# Altium PCB Jade_v1_board.PcbDoc (part 2 of 2)
Units mm, origin at the board's own origin, x right, y up, seen from the top; angles counter-clockwise.
Board outline 20 x 55.5 mm, 4 copper layers (Top Layer, Layer 1, Layer 2, Bottom Layer), stack 0.547 mm thick; 95 components, 80 nets, 388 pads, 387 vias.
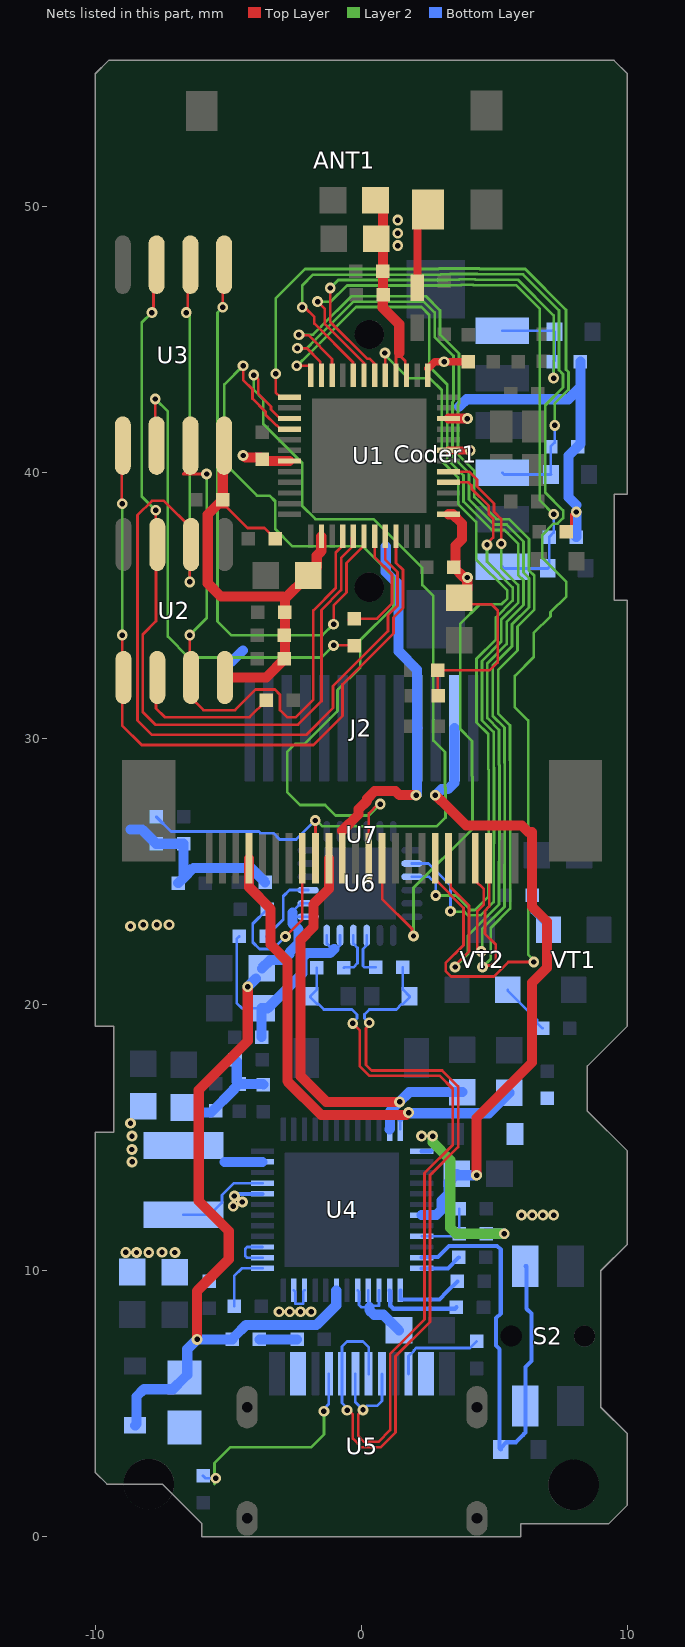
[diagram p4: the nets of this part, all layers, seen from the top]

## Via types
v1: diameter 0.406, hole 0.203, Top Layer to Bottom Layer, tented both sides, 387 vias

## Nets (pads, with @x,y where several pads share a name; then routed paths per layer and width w, separated by ;. In a path a pad name is that pad's centre, name@x,y a point inside that pad or via, vN(x,y) a via of type N, cw(c..) or ccw(c..) an arc to the next point about the centre after c; other vN are vias at no path point) (continued)
GPIO26: R13.2 U1.15 U7.9 | length 36.5
  Top Layer w0.102: v1(-4.043,43.669) -3.873,43.499 -3.873,42.968 -3.393,42.489 -3.393,42.376 -3.057,42.04 U1.15@-2.704,42.04 ; v1(-1.735,26.929) -1.727,26.921 -1.727,25.508 U7.9@-1.72,25.5
  Layer 2 w0.102: v1(-4.043,43.669) -4.043,43.11 -3.688,42.754 -3.688,41.838 -2.221,40.372 -2.221,38.75 -1.727,38.255 0.462,38.255 2.295,36.423 2.295,35.777 2.705,35.366 2.705,29.936 3.146,29.496 3.146,28.177 3.16,28.163 3.16,27.036 2.832,26.708 -1.453,26.708 -1.674,26.929 v1(-1.735,26.929)
  Bottom Layer w0.102: R13.2@-7.709,27.068 -7.152,26.512 -3.85,26.512 -3.79,26.452 -3.306,26.452 -3.067,26.213 -2.451,26.213 v1(-1.735,26.929)
GPIO27: U1.16 U7.13 | length 32.3
  Top Layer w0.102: v1(-4.445,44.022) -4.445,43.494 -4.089,43.138 -4.089,42.785 -3.593,42.289 -3.593,42.176 -3.205,41.788 -3.189,41.788 -3.041,41.64 U1.16@-2.704,41.64 ; U7.13@0.28,25.5 0.28,27.195 0.629,27.544 v1(0.711,27.544)
  Layer 2 w0.102: v1(-4.445,44.022) -5.151,43.316 -5.151,40.361 -3.929,39.139 -3.447,39.139 -3.237,38.929 -3.237,37.878 -2.599,37.239 0.041,37.239 1.206,36.075 1.206,34.959 -0.041,33.712 -0.041,32.687 -0.894,31.834 -0.894,31.043 -2.121,29.816 -2.469,29.816 -2.789,29.496 -2.789,27.993 -2.306,27.51 -1.362,27.51 -0.967,27.114 0.282,27.114 v1(0.711,27.544)
GPIO32: U1.12 U7.19 | length 39.2
  Top Layer w0.102: v1(-2.431,44.022) -1.949,44.022 -1.9,43.973 U1.12@-1.9,43.669 ; U7.19@3.28,25.5 3.357,25.424 3.357,24.419 4.045,23.73 4.045,22.004 3.526,21.485 v1(3.526,21.42)
  Layer 2 w0.102: v1(-2.431,44.022) -2.411,44.022 -1.956,44.478 -0.205,46.229 2.26,46.229 2.552,45.936 2.552,43.999 3.226,43.326 3.226,40.52 3.842,39.904 3.842,38.913 4.906,37.849 5.378,37.849 5.893,37.334 5.893,36.162 6.096,35.959 6.096,35.025 5.461,34.39 5.461,33.563 4.737,32.839 4.737,30.778 5.178,30.337 5.178,29.018 5.192,29.005 5.192,26.194 5.188,26.19 5.188,25.384 5.178,25.374 5.178,23.77 4.012,22.604 4.012,21.906 v1(3.526,21.42)
GPIO33: Coder1.4 D5.1 R22.1 U1.13 | length 24.2
  Top Layer w0.102: v1(-3.22,43.719) -3.22,43.018 U1.13@-3.041,42.84
  Layer 2 w0.102: v1(-3.22,43.719) -3.22,46.557 -2.115,47.662 2.902,47.662 2.915,47.676 4.44,47.676 4.454,47.662 6.16,47.662 7.697,46.126 7.697,43.877 7.786,43.787 7.786,43.124 7.268,42.606 v1(7.268,41.778)
  Bottom Layer w0.102: Coder1.4@5.3,40 5.366,39.934 D5.1@7.13,39.934 7.115,39.949 R22.1@7.115,40.985 7.268,41.138 v1(7.268,41.778)
GPIO34: U1.10 U7.22 | length 40.7
  Top Layer w0.102: v1(-2.347,45.189) -2.328,45.17 -1.991,45.17 -1.1,44.279 U1.10@-1.1,43.669 ; v1(4.556,21.42) 4.614,21.478 4.882,21.478 5.055,21.651 5.055,22.257 4.65,22.662 4.65,23.534 4.806,23.69 4.806,25.475 U7.22@4.78,25.5
  Layer 2 w0.102: v1(-2.347,45.189) -1.819,45.189 -1.509,45.499 -0.373,46.636 2.428,46.636 2.959,46.105 2.959,45.189 3.67,44.478 3.67,42.602 3.632,42.564 3.632,40.689 4.248,40.073 4.248,39.081 5.074,38.255 5.546,38.255 6.299,37.503 6.299,36.331 6.502,36.127 6.502,34.857 5.867,34.222 5.867,33.317 5.143,32.593 5.143,30.946 5.584,30.506 5.584,29.187 5.598,29.173 5.598,26.026 5.594,26.022 5.594,23.611 4.863,22.881 4.863,21.727 v1(4.556,21.42)
GPIO35: U1.11 U7.21 | length 38.4
  Top Layer w0.102: v1(-2.403,44.681) -2.051,44.681 -1.541,44.17 -1.541,43.71 U1.11@-1.5,43.669 ; U7.21@4.28,25.5 4.28,24.677 4.602,24.355 4.602,23.774 4.362,23.534 4.362,22.062 4.45,22.062 v1(4.508,22.004)
  Layer 2 w0.102: v1(-2.403,44.681) -2.04,44.681 -1.735,44.986 -0.289,46.432 2.344,46.432 2.755,46.021 2.755,45.105 3.467,44.394 3.467,42.698 3.429,42.661 3.429,40.604 4.045,39.988 4.045,38.997 4.99,38.052 5.462,38.052 6.096,37.419 6.096,36.246 6.299,36.043 6.299,34.941 5.664,34.306 5.664,33.478 4.94,32.754 4.94,30.862 5.381,30.422 5.381,29.103 5.395,29.089 5.395,26.11 5.391,26.106 5.391,25.299 5.381,25.29 5.381,23.686 4.54,22.845 4.54,22.037 v1(4.508,22.004)
GPIO36: U1.5 U7.14 | length 30.8
  Top Layer w0.102: U7.14@0.78,25.5 0.78,23.979 1.901,22.858 1.901,22.645 v1(1.96,22.587) ; v1(0.886,44.501) 0.893,44.494 0.893,43.677 U1.5@0.9,43.669
  Layer 2 w0.102: v1(0.886,44.501) 0.886,44.427 1.756,43.556 2.569,43.556 3.023,43.103 3.023,40.436 3.639,39.82 3.639,38.829 4.315,38.153 4.315,36.744 5.486,35.572 5.486,35.277 5.266,35.057 4.451,35.057 3.721,34.326 3.721,30.357 4.162,29.917 4.162,28.598 4.176,28.584 4.176,26.615 1.96,24.399 v1(1.96,22.587)
GPIO37: Coder1.1 D3.1 R18.1 U1.6 | length 19.2
  Top Layer w0.102: v1(-1.168,46.944) -1.168,45.675 0.224,44.283 0.318,44.283 0.5,44.101 U1.6@0.5,43.669
  Layer 2 w0.102: v1(-1.168,46.944) -0.868,47.245 3.235,47.245 3.246,47.257 3.668,47.257 3.681,47.269 4.272,47.269 4.285,47.256 5.891,47.256 7.227,45.92 v1(7.227,43.556)
  Bottom Layer w0.102: Coder1.1@5.3,45.334 7.227,45.334 D3.1@7.268,45.293 7.268,44.222 R18.1@7.216,44.171 7.227,44.159 v1(7.227,43.556)
GPIO38: Coder1.6 D4.1 R20.1 U1.7 | length 24.3
  Top Layer w0.102: v1(-1.643,46.432) -1.372,46.161 -1.372,45.591 0.1,44.119 U1.7@0.1,43.669
  Layer 2 w0.102: v1(-1.643,46.432) -1.151,46.432 -0.541,47.042 3.319,47.042 3.33,47.054 3.753,47.054 3.765,47.066 4.188,47.066 4.201,47.053 5.807,47.053 6.709,46.15 6.709,38.961 v1(7.23,38.44)
  Bottom Layer w0.102: Coder1.6@5.3,36.472 5.369,36.403 D4.1@7.006,36.403 7.064,36.461 R20.1@7.064,37.584 7.23,37.75 v1(7.23,38.44)
GPIO39: U1.8 U7.18 | length 50.2
  Top Layer w0.102: v1(-2.221,46.222) -2.141,46.222 -1.768,45.85 -1.768,45.603 -0.3,44.135 U1.8@-0.3,43.669 ; U7.18@2.78,25.5 2.78,24.707 3.842,23.646 3.842,22.239 3.17,21.567 3.17,21.273 3.378,21.064 4.983,21.064 5.527,21.608 v1(6.482,21.608)
  Layer 2 w0.102: v1(-2.221,46.222) -2.221,47.046 -1.819,47.448 2.975,47.448 2.987,47.46 3.331,47.46 3.343,47.473 4.356,47.473 4.369,47.459 6.076,47.459 7.431,46.105 7.431,43.856 7.583,43.703 7.583,43.208 6.912,42.537 6.912,39.261 7.586,38.587 7.586,38.293 7.377,38.084 7.23,38.084 6.805,37.659 6.805,36.791 7.705,35.891 7.705,35.353 7.112,34.76 7.112,34.604 6.477,33.969 6.477,33.065 5.769,32.357 5.769,31.183 6.269,30.683 6.269,21.898 6.482,21.685 v1(6.482,21.608)
IPSOUT: C24.2 C25.2 C26.2 R16.1 U4.13 U4.38 U4.39 U4.44 | length 10.2
  Layer 2 w0.381: v1(2.678,15.065) 2.678,14.829 3.343,14.164 3.343,11.615 3.566,11.392 v1(5.369,11.392)
  Bottom Layer w0.102: U4.38@-3.715,10.494 -4.305,10.494 -4.365,10.553 -4.365,10.824 -4.295,10.894 U4.39@-3.715,10.894
  Bottom Layer w0.152: v1(-4.77,12.812) -4.702,12.812 -4.62,12.894 U4.44@-3.715,12.894 ; U4.13@2.267,14.494 2.605,14.494 2.748,14.637 2.748,14.763 2.701,14.81 2.701,15.016 v1@2.653,15.065
  Bottom Layer w0.381: R16.1@4.696,11.392 v1(5.369,11.392)
  other v1: -8.855,10.693 -8.453,10.688 -7.99,10.688 -7.496,10.698 -7.01,10.688 -4.819,12.428 -4.47,12.588 2.265,15.065
LCD_BL: C28.2 J2.2 U4.19 | length 24.6
  Top Layer w0.381: v1(2.78,27.876) 2.787,27.876 2.985,27.678 3.009,27.678 3.946,26.742 6.028,26.742 6.272,26.498 6.416,26.498 6.416,23.69 6.977,23.128 6.977,21.394 6.416,20.833 6.416,17.828 4.331,15.743 v1(4.331,13.59)
  Bottom Layer w0.381: U4.19@2.267,12.094 2.275,12.101 2.826,12.101 3.015,12.29 3.015,12.639 3.284,12.909 3.284,13.335 C28.2@3.594,13.644 3.648,13.59 v1(4.331,13.59) ; v1(2.78,27.876) 2.787,27.876 3.019,28.108 3.259,28.108 3.5,28.349 J2.2@3.5,30.4
NetANT1_1: ANT1.2 C1.2 C3.2 | length 2.9
  Top Layer w0.293: C3.2@2.108,47.193 2.108,49.499 ANT1.2@2.499,49.889
NetC21_2: C21.2 R11.1 | length 1.4
  Bottom Layer w0.381: R11.1@-3.834,7.423 -3.833,7.421 -2.417,7.421 C21.2@-2.416,7.42
NetC22_2: C22.2 U4.26 | length 3.1
  Bottom Layer w0.152: U4.26@1.063,9.264 1.087,9.24 1.087,8.686 1.2,8.574 3.519,8.574 C22.2@3.576,8.631
NetC23_2: C23.2 R16.2 U4.21 | length 2.4
  Bottom Layer w0.102: U4.21@2.267,11.294 3.581,11.294 R16.2@3.68,11.392 C23.2@3.68,12.331
NetC27_2: C27.2 U4.25 | length 2.8
  Bottom Layer w0.152: U4.25@1.463,9.264 1.463,8.944 1.487,8.92 2.931,8.92 3.225,9.215 C27.2@3.61,9.601
NetD6_2: D6.2 R23.1 U5.6 U5.8 | length 28.9
  Top Layer w0.102: v1(-0.32,19.301) -0.056,19.037 -0.056,17.684 0.3,17.328 2.952,17.328 3.435,16.845 3.435,14.735 2.376,13.676 2.376,8.166 1.082,6.872 1.082,4.011 0.64,3.569 0.097,3.569 -0.117,3.782 -0.117,4.594 v1(0.061,4.772)
  Bottom Layer w0.102: R23.1@-1.672,21.395 -1.672,20.568 D6.2@-1.912,20.327 -1.912,20.277 -1.663,20.028 -1.613,20.028 -1.41,19.825 -0.356,19.825 -0.163,19.632 -0.163,19.482 -0.32,19.324 v1(-0.32,19.301) ; U5.6@-0.225,6.124 -0.225,5.059 v1(0.061,4.772) v1(0.061,4.772) 0.211,4.922 0.594,4.922 0.775,5.103 U5.8@0.775,6.124
NetD7_1: D7.1 R25.1 U5.5 U5.7 | length 30.8
  Top Layer w0.102: v1(-0.537,4.757) -0.483,4.757 -0.32,4.594 -0.32,3.698 0.012,3.365 0.724,3.365 1.285,3.926 1.285,6.788 2.579,8.082 2.579,13.592 3.638,14.651 3.638,16.929 3.036,17.531 0.384,17.531 0.177,17.739 0.177,19.119 0.3,19.242 v1(0.3,19.324)
  Bottom Layer w0.102: v1(-0.537,4.757) -0.537,4.839 -0.725,5.027 U5.5@-0.725,6.124 -0.725,7.156 -0.537,7.344 0.061,7.344 0.275,7.129 U5.7@0.275,6.124 ; v1(0.3,19.324) 0.278,19.324 0.12,19.482 0.12,19.64 0.3,19.819 0.753,19.819 0.759,19.825 1.314,19.825 1.511,20.022 1.561,20.022 1.81,20.272 D7.1@1.81,20.322 1.561,20.571 1.561,21.404 R25.1@1.557,21.409
NetFUSE1_1: FUSE1.1 U5.2 U5.11
NetL2_2: L2.2 U4.45 | length 3.6
  Bottom Layer w0.102: L2.2@-6.686,12.112 -5.686,12.112 -5.237,12.561 -5.237,12.848 -4.792,13.294 U4.45@-3.715,13.294
NetR7_2: R7.2 U2.6 | length 5.7
  Top Layer w0.102: U2.6@-7.722,32.306 -7.722,31.14 -7.391,30.81 -4.201,30.81 R7.2@-3.569,31.442
NetR8_2: R8.2 U3.6 | length 18.4
  Top Layer w0.102: U3.6@-7.748,41.022 v1(-7.748,42.771) ; v1(-1.041,33.51) -0.281,33.51 R8.2@-0.27,33.498 R8.2@-0.258,33.51
  Layer 2 w0.102: v1(-7.748,42.771) -7.275,42.298 -7.275,33.843 -6.49,33.059 -1.492,33.059 v1(-1.041,33.51)
NetR10_2: R10.2 U4.37 | length 2.3
  Bottom Layer w0.102: R10.2@-4.783,8.674 -4.783,9.807 -4.496,10.094 U4.37@-3.715,10.094
NetR15_2: R15.2 U4.24 | length 1.6
  Bottom Layer w0.152: U4.24@2.267,10.094 3.251,10.094 R15.2@3.661,10.503
NetR24_2: R24.2 U6.9 | length 2.8
  Bottom Layer w0.102: R24.2@-3.577,22.568 -2.937,23.209 -2.937,24.079 -2.704,24.312 U6.9@-2,24.312
NetR28_1: R28.1 VT1.1 | length 1.5
  Bottom Layer w0.102: R28.1@6.418,24.109 6.418,23.463 7.034,22.846 VT1.1@7.034,22.821
NetR30_1: R30.1 VT2.1 | length 2
  Bottom Layer w0.102: VT2.1@5.499,20.568 5.499,20.543 6.607,19.435 6.607,19.317 R30.1@6.81,19.114
PWDN: R29.1 U7.8 | length 6.2
  Top Layer w0.102: v1(-2.854,22.568) -2.22,23.202 U7.8@-2.22,25.5
  Bottom Layer w0.102: R29.1@-3.54,23.589 -4.083,23.046 -4.083,22.351 -3.832,22.099 -3.322,22.099 v1(-2.854,22.568)
PWR_KEY: D9.1 S2.1 S2.2 U4.23 | length 18.6
  Bottom Layer w0.152: U4.23@2.267,10.494 2.291,10.517 2.884,10.517 3.302,10.935 5.099,10.935 5.24,10.793 5.24,8.398 5.061,8.219 5.061,7.185 5.194,7.052 5.194,3.329 D9.1@5.24,3.282 5.24,3.332 5.464,3.556 5.819,3.556 6.101,3.838 6.101,3.856 6.164,3.918 S2.2@6.164,4.922 6.164,6.389 6.392,6.617 6.392,8.398 6.216,8.574 6.216,10.172 S2.1@6.164,10.172
RTC_VDD: C38.2 U4.27 U4.28 U4.29 | length 4.1
  Bottom Layer w0.102: U4.29@-0.137,9.264 -0.087,9.215 -0.087,8.718 0,8.631 0.302,8.631 ; U4.28@0.263,9.264 0.263,8.69 0.663,8.69 U4.27@0.663,9.264
  Bottom Layer w0.381: 0.302,8.631 0.302,8.522 0.477,8.347 0.828,8.347 C38.2@1.415,7.76
SD_CLK: R8.1 U1.31 | length 4.7
  Top Layer w0.102: R8.1@-0.478,34.456 -0.27,34.456 R8.1@-0.27,34.514 0.585,34.514 1.156,35.085 1.156,36.184 0.5,36.84 U1.31@0.5,37.611
SD_CMD: U1.30 U3.1 | length 22
  Top Layer w0.102: v1(-5.208,46.222) U3.1@-5.208,47.822 ; v1(-1.041,34.306) -1.041,35.014 -0.555,35.5 -0.555,36.602 0.1,37.258 U1.30@0.1,37.611
  Layer 2 w0.102: v1(-5.208,46.222) -5.41,46.021 -5.41,34.412 -4.893,33.894 -1.453,33.894 v1(-1.041,34.306)
SD_DATA0: U1.32 U2.2 U3.2 | length 40.1
  Top Layer w0.102: v1(-6.58,46.022) -6.529,46.073 -6.529,47.771 U3.2@-6.478,47.822 ; v1(-6.452,35.897) -6.452,37.306 -6.392,37.365 -6.392,37.913 -7.425,38.946 -7.877,38.946 -8.416,38.407 -8.416,30.692 -7.874,30.15 -2.071,30.15 -1.067,31.154 -1.067,31.978 1.002,34.047 1.002,34.645 1.359,35.001 1.359,36.269 0.9,36.728 U1.32@0.9,37.611
  Layer 2 w0.102: v1(-6.58,46.022) -6.452,45.893 v1(-6.452,35.897)
SD_DATA1: U1.33 U2.5 U3.5 | length 27.3
  Top Layer w0.102: U3.5@-9.018,41.022 -9.005,41.008 -9.005,38.847 v1(-8.992,38.834) ; v1(-8.992,33.896) -8.992,30.505 -8.255,29.769 -1.803,29.769 -0.711,30.861 -0.711,32.047 1.206,33.963 1.206,34.56 1.562,34.917 1.562,36.353 1.3,36.615 U1.33@1.3,37.611
  Layer 2 w0.102: v1@-9.068,38.735 -8.992,38.659 v1(-8.992,33.896)
SD_DATA2: U1.28 U2.7 U3.7 | length 23.5
  Top Layer w0.102: U3.7@-6.478,41.022 -6.478,40.17 -6.695,39.954 v1(-5.817,39.954) ; v1(-6.452,33.896) -6.452,31.587 -5.941,31.077 -4.752,31.077 -3.98,31.849 -3.251,31.849 -3.057,31.654 -3.057,31.077 -2.79,30.81 -2.461,30.81 -1.803,31.468 -1.803,34.827 -0.962,35.669 -0.962,36.996 -0.7,37.258 U1.28@-0.7,37.611
  Layer 2 w0.102: v1(-6.452,33.896) -5.817,34.531 v1(-5.817,39.954)
SD_DATA3: U1.29 U2.3 U3.3 | length 31.8
  Top Layer w0.102: v1(-7.875,46.022) -7.817,46.08 -7.817,47.753 U3.3@-7.748,47.822 ; v1(-7.73,38.59) -7.726,38.586 -7.726,37.31 -7.722,37.306 -7.722,34.42 -8.213,33.929 -8.213,30.997 -7.747,30.531 -2.383,30.531 -1.5,31.414 -1.5,34.843 -0.759,35.584 -0.759,36.799 -0.349,37.208 -0.349,37.561 U1.29@-0.3,37.611
  Layer 2 w0.102: -7.976,38.848 -7.73,38.602 v1(-7.73,38.59) -8.255,39.115 -8.255,45.642 v1(-7.875,46.022)
U0RXD: U1.40 U6.21 | length 21.8
  Top Layer w0.102: U1.40@3.279,39.64 4.035,39.64 4.146,39.529 4.146,39.399 4.784,38.761 4.784,38.45 4.953,38.281 4.953,37.567 4.724,37.338 v1(4.724,37.29)
  Layer 2 w0.102: v1(2.8,24.109) 3.55,24.109 4.096,23.564 4.271,23.564 4.771,24.064 4.771,26.141 4.781,26.151 4.781,26.358 4.785,26.362 4.785,28.836 4.771,28.85 4.771,30.169 4.331,30.61 4.331,33.007 5.055,33.731 5.055,34.558 5.69,35.193 5.69,35.693 4.724,36.659 v1(4.724,37.29)
  Bottom Layer w0.102: U6.21@1.9,24.812 2.55,24.812 2.8,24.562 v1(2.8,24.109)
U0TXD: U1.41 U6.20 | length 23.1
  Top Layer w0.102: U1.41@3.279,40.04 4.054,40.04 4.349,39.744 4.349,39.483 4.987,38.845 4.987,38.535 5.257,38.265 v1(5.257,37.334)
  Layer 2 w0.102: v1(3.35,23.515) 3.372,23.493 3.879,23.493 4.012,23.36 4.474,23.36 4.975,23.861 4.975,26.057 4.984,26.067 4.984,26.274 4.989,26.278 4.989,28.92 4.975,28.934 4.975,30.253 4.534,30.694 4.534,32.923 5.258,33.647 5.258,34.474 5.893,35.109 5.893,35.777 5.257,36.414 v1(5.257,37.334)
  Bottom Layer w0.102: U6.20@1.9,25.312 2.52,25.312 3.35,24.481 v1(3.35,23.515)
USB_CC_1: R19.2 U5.4 | length 8.2
  Layer 2 w0.102: -5.519,1.984 -5.519,2.776 -4.93,3.365 -1.89,3.365 -1.402,3.853 -1.402,4.711 v1(-1.41,4.719)
  Bottom Layer w0.102: R19.2@-5.949,2.296 -5.854,2.201 v1(-5.475,2.201) ; v1(-1.41,4.719) -1.41,4.802 -1.225,4.987 U5.4@-1.225,6.124
USB_CC_2: R21.2 U5.10 | length 3.5
  Bottom Layer w0.102: U5.10@1.775,6.124 1.775,6.794 1.973,6.991 1.973,7.007 2.062,7.096 4.083,7.096 R21.2@4.331,7.344
USB_DN: R23.2 U6.4 | length 1.7
  Bottom Layer w0.102: R23.2@-0.656,21.395 -0.642,21.409 -0.3,21.409 -0.142,21.566 -0.142,22.139 -0.3,22.296 U6.4@-0.3,22.612
USB_DP: R25.2 U6.3 | length 1.7
  Bottom Layer w0.102: U6.3@0.2,22.612 0.2,22.238 0.061,22.099 0.061,21.468 0.12,21.409 R25.2@0.541,21.409
VBAT: C29.2 D2.2 U4.34 U4.35 | length 1.4
  Bottom Layer w0.102: U4.35@-2.537,9.264 -2.487,9.215 -2.487,8.758 -2.186,8.758 -2.186,9.215 U4.34@-2.137,9.264
  other v1: -3.093,8.464 -2.692,8.464 -2.288,8.464 -1.887,8.464 6.021,12.094 6.422,12.094 6.826,12.094 7.227,12.094
VCC_1V8: 
VCC_2V5: 
VCC_3V3: C4.1 C5.1 C7.2 C8.2 C9.2 C10.2 C11.2 C30.2 C31.2 C34.2 C35.1 C41.2 J2.4 L2.1 R3.2 R4.1 R12.1 R13.1 R14.1 R17.1 R18.2 R20.2 R22.2 R26.2 R27.2 R32.2 U1.1 U1.3 U1.4 U1.19 U1.37 U1.43 U1.46 U4.47 U7.11 | length 62.7
  Top Layer w0.102: U1.4@1.3,43.669 1.3,44.455 1.346,44.501 1.651,44.196 1.651,43.719 U1.3@1.7,43.669 ; R32.2@2.898,31.616 2.874,31.64 R26.2@2.874,32.571 4.825,32.571 5.123,32.869 5.123,34.831 4.897,35.057 3.926,35.057 C35.1@3.677,35.306 ; R4.1@7.7,37.79 7.903,37.993 7.903,38.45 7.976,38.523 v1(8.08,38.523)
  Top Layer w0.293: U1.1@2.5,43.914 2.757,44.171 v1(3.111,44.171) C7.2@4.013,44.171 ; U1.43@3.279,40.84 v1(4.096,40.84)
  Top Layer w0.381: v1(-4.445,40.648) -4.438,40.648 -4.358,40.568 -3.79,40.568 C10.2@-3.726,40.504 -3.67,40.448 -2.712,40.448 U1.19@-2.704,40.44 ; -0.72,26.543 -0.107,27.156 -0.107,27.349 0.216,27.671 0.216,27.749 0.506,28.039 1.274,28.039 1.432,27.881 2.053,27.881 v1(2.058,27.876) ; C5.1@0.533,50.238 0.817,49.955 C11.2@0.817,46.698 ; C11.2@0.78,46.711 0.806,46.685 0.806,46.199 1.422,45.583 1.422,44.501 ; U1.37@3.279,38.44 3.435,38.44 3.78,38.095 3.78,37.502 3.544,37.266 3.544,36.504 C9.2@3.48,36.44 3.854,36.067 3.982,36.067 v1(3.987,36.062) 3.982,36.057 3.982,35.611 C35.1@3.677,35.306 ; U1.46@3.279,42.04 3.28,42.038 3.986,42.038 v1(3.988,42.037)
  Bottom Layer w0.381: -8.677,26.583 -8.239,26.583 R13.1@-7.709,26.052 R14.1@-6.681,26.052 R27.2@-6.681,24.78 ; R27.2@-6.884,24.577 R27.2@-6.681,24.78 ; -5.868,15.949 -5.65,15.949 -4.795,16.804 -4.795,16.824 R12.1@-4.596,17.022 ; -5.148,14.094 U4.47@-3.715,14.094 ; -4.952,32.911 -4.862,32.911 -4.456,33.317 ; R17.1@-4.748,17.929 -4.685,17.866 -4.685,17.11 R12.1@-4.596,17.022 ; R3.2@-3.685,16.999 -3.706,17.021 -4.595,17.021 R12.1@-4.596,17.022 ; C34.2@-3.617,24.602 -4.163,25.148 -6.313,25.148 R27.2@-6.681,24.78 ; 0.919,37.227 0.919,36.272 1.4,35.791 1.4,33.287 2.091,32.596 2.091,30.409 J2.4@2.1,30.4 2.091,30.391 2.091,27.916 2.058,27.883 v1(2.058,27.876) ; 3.682,42.488 3.959,42.764 7.783,42.764 8.232,43.213 ; R20.2@8.08,37.584 v1(8.08,38.523) ; 8.08,38.784 7.79,39.074 7.79,40.644 R22.2@8.131,40.985 8.232,41.086 8.232,43.213 ; R18.2@8.232,44.171 8.232,43.213
  other v1: -8.618,14.094 -8.626,14.559 -8.623,15.065 -8.677,15.544 -8.677,22.95 -7.692,23.001 -8.198,23.004 -7.226,23.009 1.369,48.539 1.369,49.002 1.369,49.499
VDD_1.8V: C40.2 U4.11 U7.10 | length 16.4
  Top Layer w0.381: U7.10@-1.22,25.5 -1.22,24.357 -1.803,23.774 -1.803,22.926 -2.283,22.446 -2.283,17.313 -1.322,16.351 v1(1.437,16.351)
  Bottom Layer w0.381: U4.11@1.063,15.323 1.071,15.331 1.071,15.986 v1(1.437,16.351) 1.803,16.717 C40.2@3.791,16.717
VDD_2.8V: C39.2 U4.12 U7.4 | length 19
  Top Layer w0.381: U7.4@-4.22,25.5 -4.22,24.414 -3.409,23.603 -3.409,22.263 -2.781,21.636 -2.781,17.128 -1.509,15.856 1.676,15.856 1.769,15.949 v1(1.775,15.949)
  Bottom Layer w0.102: U4.12@1.463,15.323 U4.12@1.463,15.66 ; v1@1.775,15.925 v1(1.775,15.949) v1@1.775,15.973
  Bottom Layer w0.178: U4.12@1.463,15.66 v1@1.775,15.973
  Bottom Layer w0.381: v1@1.775,15.925 4.8,15.925 C39.2@5.567,16.691
VDD_3V45: C33.2 C36.2 R24.1 U6.5 U6.6 | length 10
  Bottom Layer w0.102: R24.1@-4.593,22.568 -4.686,22.475 -4.686,20.061 -4.496,19.871 C36.2@-3.744,19.871 ; U6.6@-1.3,22.612 -1.3,22.296 -1.103,22.099 -1.02,22.099 -0.937,22.099 -0.8,22.236 U6.5@-0.8,22.612
  Bottom Layer w0.381: C33.2@-3.751,18.783 -3.748,18.787 -3.748,19.867 C36.2@-3.744,19.871 -3.524,19.871 -2.218,21.177 -2.218,21.77 -2.047,21.941 -1.179,21.941 -1.02,22.099
VDD_SDIO: C2.1 C14.2 C15.2 C37.2 R1.2 R2.2 U1.26 U2.8 U3.8 | length 19
  Top Layer w0.102: -5.495,38.712 -5.063,38.712 -4.273,37.923 -3.638,37.923 R2.2@-3.232,37.516
  Top Layer w0.381: U3.8@-5.208,41.022 -5.213,41.017 -5.213,38.995 C37.2@-5.217,38.991 -5.495,38.712 -5.774,38.434 -5.774,35.841 -5.277,35.344 -2.962,35.344 -2.876,35.258 ; U2.8@-5.131,32.306 -3.577,32.306 -2.876,33.007 -2.876,35.258 ; U1.26@-1.508,37.603 -1.508,37.052 -1.679,36.881 -1.679,36.454 C2.1@-1.997,36.136 -2.876,35.258
VIN_USB: 
VUSB_VIN: C32.2 D1.2 FUSE1.2 R11.2 U4.31 U6.7 U6.8 | length 30.9
  Top Layer w0.381: v1(-6.175,7.423) -6.175,9.246 -4.987,10.434 -4.987,11.499 -6.114,12.626 -6.114,16.797 -4.27,18.641 v1(-4.27,20.678)
  Bottom Layer w0.102: -2.594,23.264 -2.553,23.305 -2.007,23.305 U6.7@-2,23.312 ; -2.594,23.463 -2.594,23.511 -2.293,23.812 U6.8@-2,23.812
  Bottom Layer w0.381: D1.2@-8.501,4.19 -8.451,4.241 -8.451,5.273 -8.176,5.548 -7.092,5.548 FUSE1.2@-6.648,5.993 -6.545,6.095 -6.545,7.052 v1(-6.175,7.423) R11.2@-4.85,7.423 ; R11.2@-4.767,7.534 -4.332,7.969 -1.681,7.969 -0.944,8.706 -0.944,9.256 U4.31@-0.937,9.264 ; v1(-4.27,20.678) C32.2@-3.955,20.993 ; C32.2@-3.739,21.369 -3.429,21.678 -2.909,21.678 -2.909,21.685 -2.701,21.893 -2.701,21.97 -2.359,22.312 -2.359,22.83 -2.594,23.065 -2.594,23.264 -2.594,23.463
pads on no net: ANT1.3 ANT1.4 Coder1. Coder1.0 J2.1 J2.5 J2.12 J2.13 S2.MH1 S2.MH2 U4.3 U4.7 U4.8 U4.10 U4.14 U4.15 U4.17 U4.18 U4.20 U4.30 U4.32 U4.33 U4.36 U4.40 U4.43 U4.48 U5.0 U5.3 U5.9 U6.1 U6.10 U6.11 U6.12 U6.13 U6.14 U6.15 U6.16 U6.17 U6.18 U6.22 U6.24 U7.1 U7.23 U7.24 U7.25 U7.26

## Polygon pours and split planes (outlines as drawn)
GND on Bottom Layer "Bottom Layer-GND" (solid, remove dead copper, pour order 52): 5.685,57.513 -9.274,57.513 -11.09,55.697 -11.09,1.56 -7.978,-1.552 8.456,-1.552 10.876,0.869 10.876,56.304 9.233,57.948
no net on Bottom Layer "Top Solder-No Net" (solid, pour order 50): 9.044,14.676 8.46,14.676 8.231,14.484 8.231,12.826 8.46,12.635 9.07,12.635 9.298,12.826 9.298,14.463
NetFUSE1_1 on Bottom Layer "Bottom Layer-NetFUSE1_1" (solid, pour order 40): -5.683,4.922 -5.237,4.475 -5.237,3.873 -4.92,3.556 -3.212,3.556 -2.692,4.076 -2.692,5.273 -2.417,5.548 -2.322,5.548 -1.887,5.113 -1.887,4.7 -1.105,3.918 1.707,3.918 2.153,4.364 2.153,5.851 2.425,6.124 2.701,5.848 2.701,3.204 2.342,2.845 -6.833,2.845 -7.422,3.434 -7.422,4.592 -7.092,4.922
VCC_3V3 on Bottom Layer "Bottom Layer-VCC_3V3" (solid, remove dead copper, pour order 36): 2.928,39.494 2.928,38.664 2.217,37.953 -4.987,37.953 -6,36.94 -6,31.633 -9.284,28.349 -9.284,23.082 -8.677,22.475 -7.218,22.475 -6.648,23.046 -6.648,23.261 -8.196,24.81 -8.196,27.428 -7.709,27.915 -6.582,27.915 -4.663,29.835 -4.663,32.942 -3.914,33.692 -3.914,35.7 -3.129,36.485 2.592,36.485 3.196,35.881 3.791,36.476 3.791,37.034
VCC_3V3 on Bottom Layer "Bottom Layer-VCC_3V3 1" (solid, pour order 34): 1.996,43.828 -2.172,43.828 -3.645,42.355 -3.645,41.537 -4.053,41.129 -4.651,41.129 -4.796,40.985 -4.796,40.394 -4.651,40.249 -3.457,40.249 -2.594,41.112 -2.594,42.334 -1.887,43.041 3.56,43.041 2.438,44.163
VCC_3V3 on Bottom Layer "Bottom Layer-VCC_3V3 2" (solid, remove dead copper, pour order 30): 1.166,49.83 1.569,49.83 1.569,48.117 1.569,45.693 1.928,45.334 2.517,45.334 3.599,44.252 3.599,43.041 4.219,42.421 4.219,41.129 4.299,41.049 4.299,40.648 4.153,40.502 4.153,37.104 4.153,35.865 3.988,35.7 3.377,35.7 3.015,36.062 3.015,36.779 3.526,37.29 3.526,37.655 2.931,38.25 2.931,42.893 1.061,44.764 1.061,46.047 0.483,46.625 0.483,49.5 0.8,49.817
VBAT on Bottom Layer "Bottom Layer-VBAT" (solid, pour order 24): 5.977,15.847 6.418,16.288 6.418,16.571 6.81,16.963 7.382,16.963 7.541,16.804 7.541,11.942 7.23,11.631 6.215,11.631 5.819,12.026 5.819,14.211 5.3,14.73 5.3,15.581 5.567,15.847
IPSOUT on Bottom Layer "Bottom Layer-IPSOUT" (solid, pour order 18): 2.153,15.331 1.96,15.138 1.96,14.951 2.1,14.81 2.725,14.81 2.931,15.016 2.931,15.172 2.772,15.331
no net on Bottom Layer "Bottom Layer-No Net" (solid, pour order 16): -2.147,23.812
VBAT on Bottom Layer "Bottom Layer-VBAT 1" (solid, pour order 14): -3.356,8.718 -3.5,8.574 -3.5,8.356 -3.363,8.219 -1.668,8.219 -1.613,8.274 -1.613,8.595 -1.737,8.718
IPSOUT on Bottom Layer "Bottom Layer-IPSOUT 1" (solid, pour order 10): -4.007,10.894 -9.083,10.894 -9.284,10.693 -9.284,9.556 -8.992,9.264 -5.484,9.264 -5.148,9.601 -5.148,10.198 -4.822,10.523 -4.335,10.523 -4.335,10.853 -4.33,10.859
NetL2_2 on Bottom Layer "Bottom Layer-NetL2_2" (solid, pour order 8): -3.525,13.469 -4.973,13.469 -6.093,12.348 -6.093,11.705 -4.945,12.853 -3.708,13.286
IPSOUT on Bottom Layer "Bottom Layer-IPSOUT 2" (solid, pour order 6): -3.806,12.985 -4.083,13.262 -4.691,13.262 -5.004,12.949 -5.004,12.461 -4.837,12.294 -4.497,12.294
VCC_3V3 on Bottom Layer "Bottom Layer-VCC_3V3 3" (solid, pour order 4): -8.621,16.717 -8.852,16.485 -8.852,13.644 -8.501,13.294 -5.148,13.294 -4.556,13.885 -4.556,15.096 -5.004,15.544 -5.004,16.15 -5.57,16.717
GND on Bottom Layer "Top Solder-No Net" (solid, pour order 2): 9.16,14.666 8.576,14.666 8.348,14.474 8.348,12.816 8.576,12.625 9.186,12.625 9.414,12.816 9.414,14.453
VBAT on Bottom Layer "Top Solder-No Net" (solid, pour order 1): 6.976,14.676 6.392,14.676 6.163,14.484 6.163,12.826 6.392,12.635 7.001,12.635 7.23,12.826 7.23,14.463
GND on Layer 2 "Layer 2-GND" (solid, remove dead copper, pour order 54): 4.559,57.081 -9.362,57.081 -11.438,55.006 -11.438,1.303 -9.274,-0.861 9.058,-0.861 11.222,1.303 11.222,55.179 9.665,56.736
VBAT on Layer 2 "Layer 2-VBAT" (solid, pour order 26): 5.805,12.428 5.584,12.207 5.584,11.836 5.867,11.553 5.867,10.851 5.486,10.47 -2.812,10.47 -3.371,9.911 -3.371,8.285 -3.145,8.059 -1.733,8.059 -1.328,8.464 -1.328,9.007 -1.003,9.332 7.374,9.332 7.648,9.606 7.648,12.008 7.227,12.428
IPSOUT on Layer 2 "Layer 2-IPSOUT" (solid, remove dead copper, pour order 22): -2.233,15.544 -2.909,14.868 -2.909,12.165 -4.002,11.071 -6.46,11.071 -6.781,11.392 -6.906,11.266 -6.906,10.338 -3.642,10.338 -2.262,11.717 -2.262,14.116 -1.819,14.559 2.722,14.559 3.031,14.868 3.031,15.285 2.772,15.544
IPSOUT on Layer 2 "Layer 2-IPSOUT 1" (solid, pour order 20): -5.11,13.238 -4.356,13.238 -4.006,12.888 -4.006,12.344 -4.28,12.07 -6.138,12.07 -6.655,11.553 -6.655,10.589 -6.906,10.338 -9.017,10.338 -9.281,10.602 -9.281,11.985 -8.855,12.412 -6.648,12.412 -5.822,13.238
GND on Top Layer "Top Layer-GND" (solid, remove dead copper, pour order 58): 3.909,57.114 -8.918,57.114 -10.726,55.306 -10.726,0.785 -8.834,-1.107 9.009,-1.107 10.902,0.785 10.902,54.729 8.352,57.28
VCC_3V3 on Top Layer "Top Layer-VCC_3V3" (solid, pour order 38): -8.839,23.493 -9.238,23.094 -9.238,19.886 -8.677,19.324 -8.677,16.12 -8.941,15.856 -8.941,13.614 -8.575,13.249 -7.351,13.249 -7.01,13.59 -7.01,23.277 -7.226,23.493
VCC_3V3 on Top Layer "Top Layer-VCC_3V3 1" (solid, pour order 28): 0.919,50.734 1.45,50.734 1.557,50.627 1.557,48.283 1.025,47.753 0.817,47.961 0.817,50.238
no net on Bottom Solder (solid): 9.121,14.604 8.503,14.604 8.311,14.413 8.311,12.754 8.54,12.563 9.187,12.563 9.378,12.754 9.378,14.391
no net on Bottom Solder (solid): 6.973,14.676 6.355,14.676 6.163,14.484 6.163,12.826 6.392,12.635 7.039,12.635 7.23,12.826 7.23,14.463
GND on Layer 1 "Layer 1-GND" (solid, remove dead copper, pour order 56): 4.298,57.206 -9.807,57.206 -11.593,55.42 -11.593,2.738 -7.932,-0.922 9.657,-0.922 11.265,0.686 11.265,56.137 10.015,57.386

## Keep-outs
Keep-Out Layer:
  lines w0.2: -10,26.5 -10,19.2 -9.308,19.2 -9.308,15.2 -10,15.2 -10,14 -10,2.421 -9.564,1.984 -7.484,1.984 -6,0.5 -6,0 0,0 6,0 6,0.5 9.308,0.5 10,1.192 10,3.872 9,4.872 9,10 10,11 ; -10,26.5 -10,26.5 ; -10,26.5 -10,27.5 -10,33.685 ; -10,33.686 -10,35.2 -10,39.2 ; -10,33.686 -10,33.685 ; -10,39.2 -10,39.2 ; -10,39.2 -10,55 -9.5,55.5 9.5,55.5 10,55 10,39.2 9.5,39.2 9.5,35.2 10,35.2 10,19.2 8.5,17.7 8.5,16 10,14.5 10,11 ; 10,11 10,11

## Other copper
Multi-Layer:
  pour cut-out: 3.541,55.044 5.855,55.044 5.855,52.177 3.541,52.177
  pour cut-out: -4.727,55.044 -7.394,55.044 -7.394,52.177 -4.72,52.177
  pour cut-out: 1.582,50.973 1.582,48.79 3.478,48.79 3.478,50.973

## Silkscreen, mask and mechanical layers (free items; w line width, h text height)
Top Overlay:
  lines w0.254: -9.754,19.482 -9.754,22.606 9.754,22.606 9.754,19.482 8.179,17.907 8.179,15.85 9.754,14.275 9.754,11.354 8.585,10.185 8.585,4.724 9.754,3.556 9.754,1.473 9.119,0.838 -9.119,0.838 -9.601,1.321 -9.601,14.659 -9.119,14.659 -9.119,19.482 -9.754,19.482
  text "M5_Bitcoin_Pocket_RevA1" at -9.239,21.191 h1.52
  text "For Evaluation Only" at -9.314,19.771 h1.52
Bottom Overlay:
  region: 7.529,15.482 7.529,11.317 8.139,11.317 8.139,15.482
  text "B+" at 7.015,12.327 h0.89 r180
  text "G" at 9.329,12.327 h0.89 r180
Bottom Paste:
  rectangle: -2.629,1.121 -0.368,2.594
  rectangle: 0.521,1.095 2.781,2.568
Bottom Solder:
  rectangle: -2.781,0.943 -0.216,2.746
  rectangle: 0.368,0.917 2.934,2.721

## Text inside footprints (layer, text, board x,y; h text height)
S2: Mechanical 13 "PCB Edge" at 9.064,9.947 h0.13 r90
U5: Bottom Overlay "G" at -3.575,3.292 h0.6 r270; Bottom Overlay "G" at 2.925,3.292 h0.6 r270; Bottom Overlay "V" at 2.025,3.292 h0.6 r270; Bottom Overlay "V" at -2.875,3.392 h0.6 r270; Bottom Overlay "D+" at 0.425,1.992 h0.6 r270; Bottom Overlay "D-" at -0.675,1.992 h0.6 r270